# Altium PCB MK2.PcbDoc (part 4 of 7)
Units mil, origin at the board's own origin, x right, y up, seen from the top; angles counter-clockwise.
Board outline 3950 x 3965 mil, 2 copper layers (Top Layer, Bottom Layer); 19 components, 37 nets, 113 pads, 8 vias.
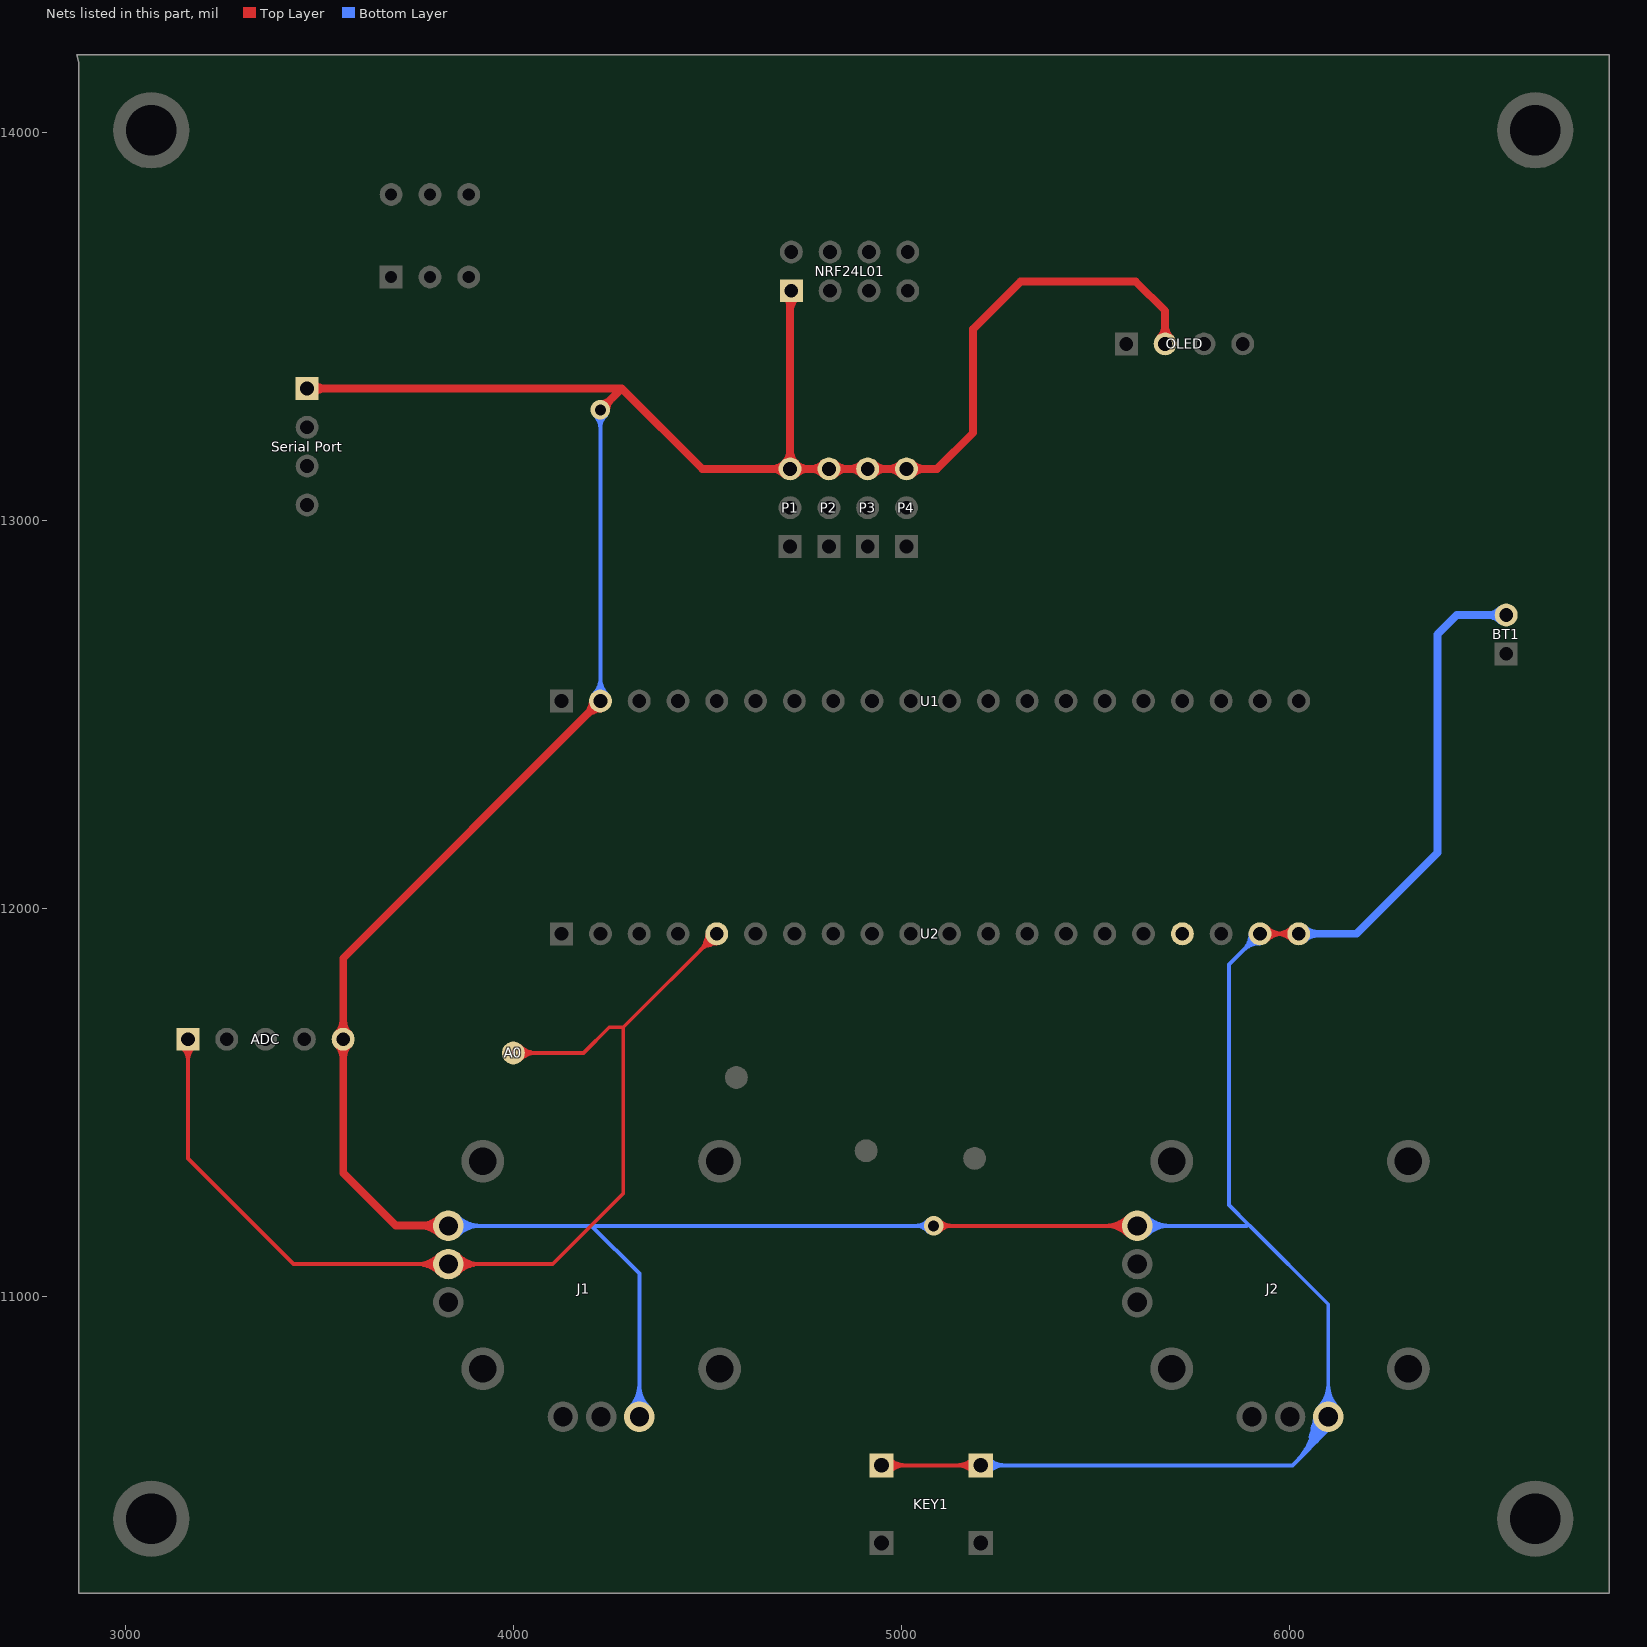
[diagram p4: the nets of this part, all layers, seen from the top]

## Via types
v1: diameter 50, hole 28, Top Layer to Bottom Layer, 8 vias

## Nets (pads, with @x,y where several pads share a name; then routed paths per layer and width w, separated by ;. In a path a pad name is that pad's centre, name@x,y a point inside that pad or via, vN(x,y) a via of type N, cw(c..) or ccw(c..) an arc to the next point about the centre after c; other vN are vias at no path point) (continued)
GND: (continued)
  Bottom Layer w10: J1.6@3832.68,11181.77 4201.54,11181.77 ; U1.2@4224.45,12534.45 v1(4224.45,13284.84) ; J1.1@4324.8,10689.65 4324.8,11058.5 4201.54,11181.77 ; v1(5083.43,11181.77) 4201.54,11181.77 ; KEY1.1@5204.76,10564.37 6007.91,10564.37 6100.39,10656.85 J2.1@6100.39,10689.65 6100.39,10979.76 5898.39,11181.77 5898.23,11181.77 5845,11235 5845,11855 U2.19@5924.45,11934.45 ; J2.6@5608.27,11181.77 5890,11181.77 ; U2.19@5899.92,11934.45 cw(c5840.71,11934.45) 5882.58,11892.58 cw(c5924.45,11850.71) U2.19@5924.45,11909.92 ; U2.19@5909.92,11934.45 cw(c5874.85,11934.45) 5899.65,11909.65 cw(c5924.45,11884.85) U2.19@5924.45,11919.92 ; J1.6@3849.91,11164.54 cw(c3891.51,11122.94) 3891.51,11181.77 ; J1.6@3849.91,11164.54 cw(c3891.51,11122.94) 3891.51,11181.77 ; J1.6@3849.91,11164.54 cw(c3891.51,11122.94) 3891.51,11181.77 ; J1.6@3849.91,11164.54 cw(c3891.51,11122.94) 3891.51,11181.77 ; J1.6@3849.91,11164.54 cw(c3891.51,11122.94) 3891.51,11181.77 ; J1.6@3849.91,11164.54 cw(c3891.51,11122.94) 3891.51,11181.77 ; J1.6@3849.91,11199 ccw(c3891.51,11240.61) 3891.51,11181.77 ; J1.6@3849.91,11199 ccw(c3891.51,11240.61) 3891.51,11181.77 ; J1.6@3849.91,11199 ccw(c3891.51,11240.61) 3891.51,11181.77 ; J1.6@3849.91,11199 ccw(c3891.51,11240.61) 3891.51,11181.77 ; J1.6@3849.91,11199 ccw(c3891.51,11240.61) 3891.51,11181.77 ; J1.6@3849.91,11199 ccw(c3891.51,11240.61) 3891.51,11181.77 ; J1.6@3856.98,11157.47 cw(c3915.65,11098.79) 3915.65,11181.77 ; J1.6@3856.98,11157.47 cw(c3915.65,11098.79) 3915.65,11181.77 ; J1.6@3856.98,11157.47 cw(c3915.65,11098.79) 3915.65,11181.77 ; J1.6@3856.98,11157.47 cw(c3915.65,11098.79) 3915.65,11181.77 ; J1.6@3856.98,11157.47 cw(c3915.65,11098.79) 3915.65,11181.77 ; J1.6@3856.98,11157.47 cw(c3915.65,11098.79) 3915.65,11181.77 ; J1.6@3856.98,11206.08 ccw(c3915.65,11264.75) 3915.65,11181.77 ; J1.6@3856.98,11206.08 ccw(c3915.65,11264.75) 3915.65,11181.77 ; J1.6@3856.98,11206.08 ccw(c3915.65,11264.75) 3915.65,11181.77 ; J1.6@3856.98,11206.08 ccw(c3915.65,11264.75) 3915.65,11181.77 ; J1.6@3856.98,11206.08 ccw(c3915.65,11264.75) 3915.65,11181.77 ; J1.6@3856.98,11206.08 ccw(c3915.65,11264.75) 3915.65,11181.77 ; U1.2@4207.11,12551.79 ccw(c4165.23,12593.66) 4224.45,12593.66 ; U1.2@4207.11,12551.79 ccw(c4165.23,12593.66) 4224.45,12593.66 ; U1.2@4207.11,12551.79 ccw(c4165.23,12593.66) 4224.45,12593.66 ; U1.2@4207.11,12551.79 ccw(c4165.23,12593.66) 4224.45,12593.66 ; U1.2@4207.11,12551.79 ccw(c4165.23,12593.66) 4224.45,12593.66 ; U1.2@4207.11,12551.79 ccw(c4165.23,12593.66) 4224.45,12593.66 ; v1@4210.31,13270.7 cw(c4176.16,13236.56) 4224.45,13236.56 ; v1@4210.31,13270.7 cw(c4176.16,13236.56) 4224.45,13236.56 ; v1@4210.31,13270.7 cw(c4176.16,13236.56) 4224.45,13236.56 ; v1@4210.31,13270.7 cw(c4176.16,13236.56) 4224.45,13236.56 ; v1@4210.31,13270.7 cw(c4176.16,13236.56) 4224.45,13236.56 ; v1@4210.31,13270.7 cw(c4176.16,13236.56) 4224.45,13236.56 ; U1.2@4214.18,12544.72 ccw(c4189.38,12569.52) 4224.45,12569.52 ; U1.2@4214.18,12544.72 ccw(c4189.38,12569.52) 4224.45,12569.52 ; U1.2@4214.18,12544.72 ccw(c4189.38,12569.52) 4224.45,12569.52 ; U1.2@4214.18,12544.72 ccw(c4189.38,12569.52) 4224.45,12569.52 ; U1.2@4214.18,12544.72 ccw(c4189.38,12569.52) 4224.45,12569.52 ; U1.2@4214.18,12544.72 ccw(c4189.38,12569.52) 4224.45,12569.52 ; 4224.45,12569.52 ccw(c4259.52,12569.52) U1.2@4234.72,12544.72 ; 4224.45,12569.52 ccw(c4259.52,12569.52) U1.2@4234.72,12544.72 ; 4224.45,12569.52 ccw(c4259.52,12569.52) U1.2@4234.72,12544.72 ; 4224.45,12569.52 ccw(c4259.52,12569.52) U1.2@4234.72,12544.72 ; 4224.45,12569.52 ccw(c4259.52,12569.52) U1.2@4234.72,12544.72 ; 4224.45,12569.52 ccw(c4259.52,12569.52) U1.2@4234.72,12544.72 ; 4224.45,12593.66 ccw(c4283.66,12593.66) U1.2@4241.79,12551.79 ; 4224.45,12593.66 ccw(c4283.66,12593.66) U1.2@4241.79,12551.79 ; 4224.45,12593.66 ccw(c4283.66,12593.66) U1.2@4241.79,12551.79 ; 4224.45,12593.66 ccw(c4283.66,12593.66) U1.2@4241.79,12551.79 ; 4224.45,12593.66 ccw(c4283.66,12593.66) U1.2@4241.79,12551.79 ; 4224.45,12593.66 ccw(c4283.66,12593.66) U1.2@4241.79,12551.79 ; 4224.45,13236.56 cw(c4272.73,13236.56) v1@4238.59,13270.7 ; 4224.45,13236.56 cw(c4272.73,13236.56) v1@4238.59,13270.7 ; 4224.45,13236.56 cw(c4272.73,13236.56) v1@4238.59,13270.7 ; 4224.45,13236.56 cw(c4272.73,13236.56) v1@4238.59,13270.7 ; 4224.45,13236.56 cw(c4272.73,13236.56) v1@4238.59,13270.7 ; 4224.45,13236.56 cw(c4272.73,13236.56) v1@4238.59,13270.7 ; J1.1@4300.5,10713.95 ccw(c4241.83,10772.62) 4324.8,10772.62 ; J1.1@4300.5,10713.95 ccw(c4241.83,10772.62) 4324.8,10772.62 ; J1.1@4300.5,10713.95 ccw(c4241.83,10772.62) 4324.8,10772.62 ; J1.1@4300.5,10713.95 ccw(c4241.83,10772.62) 4324.8,10772.62 ; J1.1@4300.5,10713.95 ccw(c4241.83,10772.62) 4324.8,10772.62 ; J1.1@4300.5,10713.95 ccw(c4241.83,10772.62) 4324.8,10772.62 ; J1.1@4307.57,10706.88 ccw(c4265.97,10748.48) 4324.8,10748.48 ; J1.1@4307.57,10706.88 ccw(c4265.97,10748.48) 4324.8,10748.48 ; J1.1@4307.57,10706.88 ccw(c4265.97,10748.48) 4324.8,10748.48 ; J1.1@4307.57,10706.88 ccw(c4265.97,10748.48) 4324.8,10748.48 ; J1.1@4307.57,10706.88 ccw(c4265.97,10748.48) 4324.8,10748.48 ; J1.1@4307.57,10706.88 ccw(c4265.97,10748.48) 4324.8,10748.48 ; 4324.8,10748.48 ccw(c4383.64,10748.48) J1.1@4342.04,10706.88 ; 4324.8,10748.48 ccw(c4383.64,10748.48) J1.1@4342.04,10706.88 ; 4324.8,10748.48 ccw(c4383.64,10748.48) J1.1@4342.04,10706.88 ; 4324.8,10748.48 ccw(c4383.64,10748.48) J1.1@4342.04,10706.88 ; 4324.8,10748.48 ccw(c4383.64,10748.48) J1.1@4342.04,10706.88 ; 4324.8,10748.48 ccw(c4383.64,10748.48) J1.1@4342.04,10706.88 ; 4324.8,10772.62 ccw(c4407.78,10772.62) J1.1@4349.11,10713.95 ; 4324.8,10772.62 ccw(c4407.78,10772.62) J1.1@4349.11,10713.95 ; 4324.8,10772.62 ccw(c4407.78,10772.62) J1.1@4349.11,10713.95 ; 4324.8,10772.62 ccw(c4407.78,10772.62) J1.1@4349.11,10713.95 ; 4324.8,10772.62 ccw(c4407.78,10772.62) J1.1@4349.11,10713.95 ; 4324.8,10772.62 ccw(c4407.78,10772.62) J1.1@4349.11,10713.95 ; 5035.14,11181.77 cw(c5035.14,11133.49) v1@5069.28,11167.63 ; 5035.14,11181.77 ccw(c5035.14,11230.06) v1@5069.28,11195.91 ; 5035.14,11181.77 ccw(c5035.14,11230.06) v1@5069.28,11195.91 ; 5035.14,11181.77 cw(c5035.14,11133.49) v1@5069.28,11167.63 ; 5035.14,11181.77 ccw(c5035.14,11230.06) v1@5069.28,11195.91 ; 5035.14,11181.77 cw(c5035.14,11133.49) v1@5069.28,11167.63 ; 5035.14,11181.77 ccw(c5035.14,11230.06) v1@5069.28,11195.91 ; 5035.14,11181.77 cw(c5035.14,11133.49) v1@5069.28,11167.63 ; 5035.14,11181.77 ccw(c5035.14,11230.06) v1@5069.28,11195.91 ; 5035.14,11181.77 cw(c5035.14,11133.49) v1@5069.28,11167.63 ; 5035.14,11181.77 ccw(c5035.14,11230.06) v1@5069.28,11195.91 ; 5035.14,11181.77 cw(c5035.14,11133.49) v1@5069.28,11167.63 ; KEY1.1@5216.08,10553.06 cw(c5243.39,10525.74) 5243.39,10564.37 ; KEY1.1@5216.08,10553.06 cw(c5243.39,10525.74) 5243.39,10564.37 ; KEY1.1@5216.08,10553.06 cw(c5243.39,10525.74) 5243.39,10564.37 ; KEY1.1@5216.08,10553.06 cw(c5243.39,10525.74) 5243.39,10564.37 ; KEY1.1@5216.08,10553.06 cw(c5243.39,10525.74) 5243.39,10564.37 ; KEY1.1@5216.08,10553.06 cw(c5243.39,10525.74) 5243.39,10564.37 ; KEY1.1@5216.08,10575.68 ccw(c5243.39,10603) 5243.39,10564.37 ; KEY1.1@5216.08,10575.68 ccw(c5243.39,10603) 5243.39,10564.37 ; KEY1.1@5216.08,10575.68 ccw(c5243.39,10603) 5243.39,10564.37 ; KEY1.1@5216.08,10575.68 ccw(c5243.39,10603) 5243.39,10564.37 ; KEY1.1@5216.08,10575.68 ccw(c5243.39,10603) 5243.39,10564.37 ; KEY1.1@5216.08,10575.68 ccw(c5243.39,10603) 5243.39,10564.37 ; KEY1.1@5223.15,10545.99 cw(c5267.53,10501.6) 5267.53,10564.37 ; KEY1.1@5223.15,10545.99 cw(c5267.53,10501.6) 5267.53,10564.37 ; KEY1.1@5223.15,10545.99 cw(c5267.53,10501.6) 5267.53,10564.37 ; KEY1.1@5223.15,10545.99 cw(c5267.53,10501.6) 5267.53,10564.37 ; KEY1.1@5223.15,10545.99 cw(c5267.53,10501.6) 5267.53,10564.37 ; KEY1.1@5223.15,10545.99 cw(c5267.53,10501.6) 5267.53,10564.37 ; KEY1.1@5223.15,10582.75 ccw(c5267.53,10627.14) 5267.53,10564.37 ; KEY1.1@5223.15,10582.75 ccw(c5267.53,10627.14) 5267.53,10564.37 ; KEY1.1@5223.15,10582.75 ccw(c5267.53,10627.14) 5267.53,10564.37 ; KEY1.1@5223.15,10582.75 ccw(c5267.53,10627.14) 5267.53,10564.37 ; KEY1.1@5223.15,10582.75 ccw(c5267.53,10627.14) 5267.53,10564.37 ; KEY1.1@5223.15,10582.75 ccw(c5267.53,10627.14) 5267.53,10564.37 ; J2.6@5625.5,11164.54 cw(c5667.1,11122.94) 5667.1,11181.77 ; J2.6@5625.5,11164.54 cw(c5667.1,11122.94) 5667.1,11181.77 ; J2.6@5625.5,11164.54 cw(c5667.1,11122.94) 5667.1,11181.77 ; J2.6@5625.5,11164.54 cw(c5667.1,11122.94) 5667.1,11181.77 ; J2.6@5625.5,11164.54 cw(c5667.1,11122.94) 5667.1,11181.77 ; J2.6@5625.5,11164.54 cw(c5667.1,11122.94) 5667.1,11181.77 ; J2.6@5625.5,11199 ccw(c5667.1,11240.61) 5667.1,11181.77 ; J2.6@5625.5,11199 ccw(c5667.1,11240.61) 5667.1,11181.77 ; J2.6@5625.5,11199 ccw(c5667.1,11240.61) 5667.1,11181.77 ; J2.6@5625.5,11199 ccw(c5667.1,11240.61) 5667.1,11181.77 ; J2.6@5625.5,11199 ccw(c5667.1,11240.61) 5667.1,11181.77 ; J2.6@5625.5,11199 ccw(c5667.1,11240.61) 5667.1,11181.77 ; J2.6@5632.57,11157.47 cw(c5691.24,11098.79) 5691.24,11181.77 ; J2.6@5632.57,11157.47 cw(c5691.24,11098.79) 5691.24,11181.77 ; J2.6@5632.57,11157.47 cw(c5691.24,11098.79) 5691.24,11181.77 ; J2.6@5632.57,11157.47 cw(c5691.24,11098.79) 5691.24,11181.77 ; J2.6@5632.57,11157.47 cw(c5691.24,11098.79) 5691.24,11181.77 ; J2.6@5632.57,11157.47 cw(c5691.24,11098.79) 5691.24,11181.77 ; J2.6@5632.57,11206.08 ccw(c5691.24,11264.75) 5691.24,11181.77 ; J2.6@5632.57,11206.08 ccw(c5691.24,11264.75) 5691.24,11181.77 ; J2.6@5632.57,11206.08 ccw(c5691.24,11264.75) 5691.24,11181.77 ; J2.6@5632.57,11206.08 ccw(c5691.24,11264.75) 5691.24,11181.77 ; J2.6@5632.57,11206.08 ccw(c5691.24,11264.75) 5691.24,11181.77 ; J2.6@5632.57,11206.08 ccw(c5691.24,11264.75) 5691.24,11181.77 ; 5890.51,11900.51 ccw(c5865.99,11925.04) U2.19@5900.23,11930.55 ; 5890.51,11900.51 cw(c5915.04,11875.99) U2.19@5920.55,11910.23 ; 5890.51,11900.51 ccw(c5865.99,11925.04) U2.19@5900.23,11930.55 ; 5890.51,11900.51 cw(c5915.04,11875.99) U2.19@5920.55,11910.23 ; 5890.51,11900.51 ccw(c5865.99,11925.04) U2.19@5900.23,11930.55 ; 5890.51,11900.51 cw(c5915.04,11875.99) U2.19@5920.55,11910.23 ; 5890.51,11900.51 ccw(c5865.99,11925.04) U2.19@5900.23,11930.55 ; 5890.51,11900.51 cw(c5915.04,11875.99) U2.19@5920.55,11910.23 ; 5890.51,11900.51 ccw(c5865.99,11925.04) U2.19@5900.23,11930.55 ; 5890.51,11900.51 cw(c5915.04,11875.99) U2.19@5920.55,11910.23 ; 6018.53,10574.99 ccw(c5903.87,10689.65) J2.1@6066.02,10689.65 ; 6018.53,10574.99 ccw(c5903.87,10689.65) J2.1@6066.02,10689.65 ; 6018.53,10574.99 ccw(c5903.87,10689.65) J2.1@6066.02,10689.65 ; 6018.53,10574.99 ccw(c5903.87,10689.65) J2.1@6066.02,10689.65 ; 6018.53,10574.99 ccw(c5903.87,10689.65) J2.1@6066.02,10689.65 ; 6018.53,10574.99 ccw(c5903.87,10689.65) J2.1@6066.02,10689.65 ; 6035.6,10592.06 ccw(c5938.01,10689.65) J2.1@6076.02,10689.65 ; 6035.6,10592.06 ccw(c5938.01,10689.65) J2.1@6076.02,10689.65 ; 6035.6,10592.06 ccw(c5938.01,10689.65) J2.1@6076.02,10689.65 ; 6035.6,10592.06 ccw(c5938.01,10689.65) J2.1@6076.02,10689.65 ; 6035.6,10592.06 ccw(c5938.01,10689.65) J2.1@6076.02,10689.65 ; 6035.6,10592.06 ccw(c5938.01,10689.65) J2.1@6076.02,10689.65 ; 6052.67,10609.13 ccw(c5972.16,10689.65) J2.1@6086.02,10689.65 ; 6052.67,10609.13 ccw(c5972.16,10689.65) J2.1@6086.02,10689.65 ; 6052.67,10609.13 ccw(c5972.16,10689.65) J2.1@6086.02,10689.65 ; 6052.67,10609.13 ccw(c5972.16,10689.65) J2.1@6086.02,10689.65 ; 6052.67,10609.13 ccw(c5972.16,10689.65) J2.1@6086.02,10689.65 ; 6052.67,10609.13 ccw(c5972.16,10689.65) J2.1@6086.02,10689.65 ; 6054.39,10636.75 cw(c6139.73,10617.98) J2.1@6097.68,10694.58 ; 6054.39,10636.75 cw(c6139.73,10617.98) J2.1@6097.68,10694.58 ; 6054.39,10636.75 cw(c6139.73,10617.98) J2.1@6097.68,10694.58 ; 6054.39,10636.75 cw(c6139.73,10617.98) J2.1@6097.68,10694.58 ; 6054.39,10636.75 cw(c6139.73,10617.98) J2.1@6097.68,10694.58 ; 6054.39,10636.75 cw(c6139.73,10617.98) J2.1@6097.68,10694.58 ; 6054.39,10636.75 cw(c6139.73,10617.98) J2.1@6097.68,10694.58 ; 6054.39,10636.75 cw(c6139.73,10617.98) J2.1@6097.68,10694.58 ; 6054.39,10636.75 cw(c6139.73,10617.98) J2.1@6097.68,10694.58 ; 6054.39,10636.75 cw(c6139.73,10617.98) J2.1@6097.68,10694.58 ; 6054.39,10636.75 cw(c6139.73,10617.98) J2.1@6097.68,10694.58 ; 6054.39,10636.75 cw(c6139.73,10617.98) J2.1@6097.68,10694.58 ; 6054.39,10636.75 cw(c6139.73,10617.98) J2.1@6097.68,10694.58 ; 6054.39,10636.75 cw(c6139.73,10617.98) J2.1@6097.68,10694.58 ; 6054.39,10636.75 cw(c6139.73,10617.98) J2.1@6097.68,10694.58 ; 6058.05,10620.86 cw(c6138.59,10599.81) J2.1@6106.02,10676.42 ; 6058.05,10620.86 cw(c6138.59,10599.81) J2.1@6106.02,10676.42 ; 6058.05,10620.86 cw(c6138.59,10599.81) J2.1@6106.02,10676.42 ; 6058.05,10620.86 cw(c6138.59,10599.81) J2.1@6106.02,10676.42 ; 6058.05,10620.86 cw(c6138.59,10599.81) J2.1@6106.02,10676.42 ; 6058.05,10620.86 cw(c6138.59,10599.81) J2.1@6106.02,10676.42 ; 6058.05,10620.86 cw(c6138.59,10599.81) J2.1@6106.02,10676.42 ; 6058.05,10620.86 cw(c6138.59,10599.81) J2.1@6106.02,10676.42 ; 6058.05,10620.86 cw(c6138.59,10599.81) J2.1@6106.02,10676.42 ; 6058.05,10620.86 cw(c6138.59,10599.81) J2.1@6106.02,10676.42 ; 6058.05,10620.86 cw(c6138.59,10599.81) J2.1@6106.02,10676.42 ; 6058.05,10620.86 cw(c6138.59,10599.81) J2.1@6106.02,10676.42 ; 6058.05,10620.86 cw(c6138.59,10599.81) J2.1@6106.02,10676.42 ; 6058.05,10620.86 cw(c6138.59,10599.81) J2.1@6106.02,10676.42 ; 6058.05,10620.86 cw(c6138.59,10599.81) J2.1@6106.02,10676.42 ; 6059.12,10658.27 cw(c6125.65,10643.63) J2.1@6092.87,10703.35 ; 6059.12,10658.27 cw(c6125.65,10643.63) J2.1@6092.87,10703.35 ; 6059.12,10658.27 cw(c6125.65,10643.63) J2.1@6092.87,10703.35 ; 6059.12,10658.27 cw(c6125.65,10643.63) J2.1@6092.87,10703.35 ; 6059.12,10658.27 cw(c6125.65,10643.63) J2.1@6092.87,10703.35 ; 6059.12,10658.27 cw(c6125.65,10643.63) J2.1@6092.87,10703.35 ; 6059.12,10658.27 cw(c6125.65,10643.63) J2.1@6092.87,10703.35 ; 6059.12,10658.27 cw(c6125.65,10643.63) J2.1@6092.87,10703.35 ; 6059.12,10658.27 cw(c6125.65,10643.63) J2.1@6092.87,10703.35 ; 6059.12,10658.27 cw(c6125.65,10643.63) J2.1@6092.87,10703.35 ; 6059.12,10658.27 cw(c6125.65,10643.63) J2.1@6092.87,10703.35 ; 6059.12,10658.27 cw(c6125.65,10643.63) J2.1@6092.87,10703.35 ; 6059.12,10658.27 cw(c6125.65,10643.63) J2.1@6092.87,10703.35 ; 6059.12,10658.27 cw(c6125.65,10643.63) J2.1@6092.87,10703.35 ; 6059.12,10658.27 cw(c6125.65,10643.63) J2.1@6092.87,10703.35 ; 6063.2,10640.56 cw(c6128.52,10623.48) J2.1@6102.1,10685.62 ; 6063.2,10640.56 cw(c6128.52,10623.48) J2.1@6102.1,10685.62 ; 6063.2,10640.56 cw(c6128.52,10623.48) J2.1@6102.1,10685.62 ; 6063.2,10640.56 cw(c6128.52,10623.48) J2.1@6102.1,10685.62 ; 6063.2,10640.56 cw(c6128.52,10623.48) J2.1@6102.1,10685.62 ; 6063.2,10640.56 cw(c6128.52,10623.48) J2.1@6102.1,10685.62 ; 6063.2,10640.56 cw(c6128.52,10623.48) J2.1@6102.1,10685.62 ; 6063.2,10640.56 cw(c6128.52,10623.48) J2.1@6102.1,10685.62 ; 6063.2,10640.56 cw(c6128.52,10623.48) J2.1@6102.1,10685.62 ; 6063.2,10640.56 cw(c6128.52,10623.48) J2.1@6102.1,10685.62 ; 6063.2,10640.56 cw(c6128.52,10623.48) J2.1@6102.1,10685.62 ; 6063.2,10640.56 cw(c6128.52,10623.48) J2.1@6102.1,10685.62 ; 6063.2,10640.56 cw(c6128.52,10623.48) J2.1@6102.1,10685.62 ; 6063.2,10640.56 cw(c6128.52,10623.48) J2.1@6102.1,10685.62 ; 6063.2,10640.56 cw(c6128.52,10623.48) J2.1@6102.1,10685.62 ; 6068.34,10660.25 cw(c6118.46,10647.16) J2.1@6098.19,10694.83 ; 6068.34,10660.25 cw(c6118.46,10647.16) J2.1@6098.19,10694.83 ; 6068.34,10660.25 cw(c6118.46,10647.16) J2.1@6098.19,10694.83 ; 6068.34,10660.25 cw(c6118.46,10647.16) J2.1@6098.19,10694.83 ; 6068.34,10660.25 cw(c6118.46,10647.16) J2.1@6098.19,10694.83 ; 6068.34,10660.25 cw(c6118.46,10647.16) J2.1@6098.19,10694.83 ; 6068.34,10660.25 cw(c6118.46,10647.16) J2.1@6098.19,10694.83 ; 6068.34,10660.25 cw(c6118.46,10647.16) J2.1@6098.19,10694.83 ; 6068.34,10660.25 cw(c6118.46,10647.16) J2.1@6098.19,10694.83 ; 6068.34,10660.25 cw(c6118.46,10647.16) J2.1@6098.19,10694.83 ; 6068.34,10660.25 cw(c6118.46,10647.16) J2.1@6098.19,10694.83 ; 6068.34,10660.25 cw(c6118.46,10647.16) J2.1@6098.19,10694.83 ; 6068.34,10660.25 cw(c6118.46,10647.16) J2.1@6098.19,10694.83 ; 6068.34,10660.25 cw(c6118.46,10647.16) J2.1@6098.19,10694.83 ; 6068.34,10660.25 cw(c6118.46,10647.16) J2.1@6098.19,10694.83 ; 6069.37,10647.75 ccw(c6059.55,10660.29) J2.1@6072.48,10669.59 ; 6069.37,10647.75 ccw(c6059.55,10660.29) J2.1@6072.48,10669.59 ; 6069.37,10647.75 ccw(c6059.55,10660.29) J2.1@6072.48,10669.59 ; 6069.37,10647.75 ccw(c6059.55,10660.29) J2.1@6072.48,10669.59 ; 6069.37,10647.75 ccw(c6059.55,10660.29) J2.1@6072.48,10669.59 ; 6069.37,10647.75 ccw(c6059.55,10660.29) J2.1@6072.48,10669.59 ; 6069.37,10647.75 ccw(c6059.55,10660.29) J2.1@6072.48,10669.59 ; 6069.37,10647.75 ccw(c6059.55,10660.29) J2.1@6072.48,10669.59 ; 6069.37,10647.75 ccw(c6059.55,10660.29) J2.1@6072.48,10669.59 ; 6069.37,10647.75 ccw(c6059.55,10660.29) J2.1@6072.48,10669.59 ; 6069.37,10647.75 ccw(c6059.55,10660.29) J2.1@6072.48,10669.59 ; 6069.37,10647.75 ccw(c6059.55,10660.29) J2.1@6072.48,10669.59 ; 6069.37,10647.75 ccw(c6059.55,10660.29) J2.1@6072.48,10669.59 ; 6069.37,10647.75 ccw(c6059.55,10660.29) J2.1@6072.48,10669.59 ; 6069.37,10647.75 ccw(c6059.55,10660.29) J2.1@6072.48,10669.59 ; 6069.37,10647.75 ccw(c6059.55,10660.29) J2.1@6072.48,10669.59 ; 6069.37,10647.75 ccw(c6059.55,10660.29) J2.1@6072.48,10669.59 ; 6069.37,10647.75 ccw(c6059.55,10660.29) J2.1@6072.48,10669.59 ; 6069.37,10647.75 ccw(c6059.55,10660.29) J2.1@6072.48,10669.59 ; 6069.37,10647.75 ccw(c6059.55,10660.29) J2.1@6072.48,10669.59 ; 6069.74,10626.2 ccw(c6006.3,10689.65) J2.1@6096.02,10689.65 ; 6069.74,10626.2 ccw(c6006.3,10689.65) J2.1@6096.02,10689.65 ; 6069.74,10626.2 ccw(c6006.3,10689.65) J2.1@6096.02,10689.65 ; 6069.74,10626.2 ccw(c6006.3,10689.65) J2.1@6096.02,10689.65 ; 6069.74,10626.2 ccw(c6006.3,10689.65) J2.1@6096.02,10689.65 ; 6069.74,10626.2 ccw(c6006.3,10689.65) J2.1@6096.02,10689.65 ; 6069.98,10648.23 cw(c6091.91,10620.21) J2.1@6096.23,10655.53 ; 6069.98,10648.23 cw(c6091.91,10620.21) J2.1@6096.23,10655.53 ; 6069.98,10648.23 cw(c6091.91,10620.21) J2.1@6096.23,10655.53 ; 6069.98,10648.23 cw(c6091.91,10620.21) J2.1@6096.23,10655.53 ; 6069.98,10648.23 cw(c6091.91,10620.21) J2.1@6096.23,10655.53 ; 6069.98,10648.23 cw(c6091.91,10620.21) J2.1@6096.23,10655.53 ; 6069.98,10648.23 cw(c6091.91,10620.21) J2.1@6096.23,10655.53 ; 6069.98,10648.23 cw(c6091.91,10620.21) J2.1@6096.23,10655.53 ; 6069.98,10648.23 cw(c6091.91,10620.21) J2.1@6096.23,10655.53 ; 6069.98,10648.23 cw(c6091.91,10620.21) J2.1@6096.23,10655.53 ; 6069.98,10648.23 cw(c6091.91,10620.21) J2.1@6096.23,10655.53 ; 6069.98,10648.23 cw(c6091.91,10620.21) J2.1@6096.23,10655.53 ; 6069.98,10648.23 cw(c6091.91,10620.21) J2.1@6096.23,10655.53 ; 6069.98,10648.23 cw(c6091.91,10620.21) J2.1@6096.23,10655.53 ; 6069.98,10648.23 cw(c6091.91,10620.21) J2.1@6096.23,10655.53 ; 6069.98,10648.23 cw(c6091.91,10620.21) J2.1@6096.23,10655.53 ; 6069.98,10648.23 cw(c6091.91,10620.21) J2.1@6096.23,10655.53 ; 6069.98,10648.23 cw(c6091.91,10620.21) J2.1@6096.23,10655.53 ; 6069.98,10648.23 cw(c6091.91,10620.21) J2.1@6096.23,10655.53 ; 6069.98,10648.23 cw(c6091.91,10620.21) J2.1@6096.23,10655.53 ; J2.1@6070.63,10672.46 cw(c6039.81,10654.67) 6074.18,10645.46 ; J2.1@6070.63,10672.46 cw(c6039.81,10654.67) 6074.18,10645.46 ; J2.1@6070.63,10672.46 cw(c6039.81,10654.67) 6074.18,10645.46 ; J2.1@6070.63,10672.46 cw(c6039.81,10654.67) 6074.18,10645.46 ; J2.1@6070.63,10672.46 cw(c6039.81,10654.67) 6074.18,10645.46 ; J2.1@6070.63,10672.46 cw(c6039.81,10654.67) 6074.18,10645.46 ; J2.1@6070.63,10672.46 cw(c6039.81,10654.67) 6074.18,10645.46 ; J2.1@6070.63,10672.46 cw(c6039.81,10654.67) 6074.18,10645.46 ; J2.1@6070.63,10672.46 cw(c6039.81,10654.67) 6074.18,10645.46 ; J2.1@6070.63,10672.46 cw(c6039.81,10654.67) 6074.18,10645.46 ; J2.1@6070.63,10672.46 cw(c6039.81,10654.67) 6074.18,10645.46 ; J2.1@6070.63,10672.46 cw(c6039.81,10654.67) 6074.18,10645.46 ; J2.1@6070.63,10672.46 cw(c6039.81,10654.67) 6074.18,10645.46 ; J2.1@6070.63,10672.46 cw(c6039.81,10654.67) 6074.18,10645.46 ; J2.1@6070.63,10672.46 cw(c6039.81,10654.67) 6074.18,10645.46 ; 6073.85,10644.21 cw(c6117.66,10632.46) J2.1@6104.55,10675.89 ; 6073.85,10644.21 cw(c6117.66,10632.46) J2.1@6104.55,10675.89 ; 6073.85,10644.21 cw(c6117.66,10632.46) J2.1@6104.55,10675.89 ; 6073.85,10644.21 cw(c6117.66,10632.46) J2.1@6104.55,10675.89 ; 6073.85,10644.21 cw(c6117.66,10632.46) J2.1@6104.55,10675.89 ; 6073.85,10644.21 cw(c6117.66,10632.46) J2.1@6104.55,10675.89 ; 6073.85,10644.21 cw(c6117.66,10632.46) J2.1@6104.55,10675.89 ; 6073.85,10644.21 cw(c6117.66,10632.46) J2.1@6104.55,10675.89 ; 6073.85,10644.21 cw(c6117.66,10632.46) J2.1@6104.55,10675.89 ; 6073.85,10644.21 cw(c6117.66,10632.46) J2.1@6104.55,10675.89 ; 6073.85,10644.21 cw(c6117.66,10632.46) J2.1@6104.55,10675.89 ; 6073.85,10644.21 cw(c6117.66,10632.46) J2.1@6104.55,10675.89 ; 6073.85,10644.21 cw(c6117.66,10632.46) J2.1@6104.55,10675.89 ; 6073.85,10644.21 cw(c6117.66,10632.46) J2.1@6104.55,10675.89 ; 6073.85,10644.21 cw(c6117.66,10632.46) J2.1@6104.55,10675.89 ; J2.1@6076.09,10713.95 ccw(c6017.42,10772.62) 6100.39,10772.62 ; J2.1@6076.09,10713.95 ccw(c6017.42,10772.62) 6100.39,10772.62 ; J2.1@6076.09,10713.95 ccw(c6017.42,10772.62) 6100.39,10772.62 ; J2.1@6076.09,10713.95 ccw(c6017.42,10772.62) 6100.39,10772.62 ; J2.1@6076.09,10713.95 ccw(c6017.42,10772.62) 6100.39,10772.62 ; J2.1@6076.09,10713.95 ccw(c6017.42,10772.62) 6100.39,10772.62 ; 6077.57,10654.17 ccw(c6068.02,10666.38) J2.1@6080.6,10675.42 ; 6077.57,10654.17 ccw(c6068.02,10666.38) J2.1@6080.6,10675.42 ; 6077.57,10654.17 ccw(c6068.02,10666.38) J2.1@6080.6,10675.42 ; 6077.57,10654.17 ccw(c6068.02,10666.38) J2.1@6080.6,10675.42 ; 6077.57,10654.17 ccw(c6068.02,10666.38) J2.1@6080.6,10675.42 ; 6077.57,10654.17 ccw(c6068.02,10666.38) J2.1@6080.6,10675.42 ; 6077.57,10654.17 ccw(c6068.02,10666.38) J2.1@6080.6,10675.42 ; 6077.57,10654.17 ccw(c6068.02,10666.38) J2.1@6080.6,10675.42 ; 6077.57,10654.17 ccw(c6068.02,10666.38) J2.1@6080.6,10675.42 ; 6077.57,10654.17 ccw(c6068.02,10666.38) J2.1@6080.6,10675.42 ; 6077.57,10654.17 ccw(c6068.02,10666.38) J2.1@6080.6,10675.42 ; 6077.57,10654.17 ccw(c6068.02,10666.38) J2.1@6080.6,10675.42 ; 6077.57,10654.17 ccw(c6068.02,10666.38) J2.1@6080.6,10675.42 ; 6077.57,10654.17 ccw(c6068.02,10666.38) J2.1@6080.6,10675.42 ; 6077.57,10654.17 ccw(c6068.02,10666.38) J2.1@6080.6,10675.42 ; 6077.57,10654.17 ccw(c6068.02,10666.38) J2.1@6080.6,10675.42 ; 6077.57,10654.17 ccw(c6068.02,10666.38) J2.1@6080.6,10675.42 ; 6077.57,10654.17 ccw(c6068.02,10666.38) J2.1@6080.6,10675.42 ; 6077.57,10654.17 ccw(c6068.02,10666.38) J2.1@6080.6,10675.42 ; 6077.57,10654.17 ccw(c6068.02,10666.38) J2.1@6080.6,10675.42 ; J2.1@6083.16,10706.88 ccw(c6041.56,10748.48) 6100.39,10748.48 ; J2.1@6083.16,10706.88 ccw(c6041.56,10748.48) 6100.39,10748.48 ; J2.1@6083.16,10706.88 ccw(c6041.56,10748.48) 6100.39,10748.48 ; J2.1@6083.16,10706.88 ccw(c6041.56,10748.48) 6100.39,10748.48 ; J2.1@6083.16,10706.88 ccw(c6041.56,10748.48) 6100.39,10748.48 ; J2.1@6083.16,10706.88 ccw(c6041.56,10748.48) 6100.39,10748.48 ; 6085.79,10651.46 cw(c6103.99,10646.58) J2.1@6102.42,10665.36 ; 6085.79,10651.46 cw(c6103.99,10646.58) J2.1@6102.42,10665.36 ; 6085.79,10651.46 cw(c6103.99,10646.58) J2.1@6102.42,10665.36 ; 6085.79,10651.46 cw(c6103.99,10646.58) J2.1@6102.42,10665.36 ; 6085.79,10651.46 cw(c6103.99,10646.58) J2.1@6102.42,10665.36 ; 6085.79,10651.46 cw(c6103.99,10646.58) J2.1@6102.42,10665.36 ; 6085.79,10651.46 cw(c6103.99,10646.58) J2.1@6102.42,10665.36 ; 6085.79,10651.46 cw(c6103.99,10646.58) J2.1@6102.42,10665.36 ; 6085.79,10651.46 cw(c6103.99,10646.58) J2.1@6102.42,10665.36 ; 6085.79,10651.46 cw(c6103.99,10646.58) J2.1@6102.42,10665.36 ; 6085.79,10651.46 cw(c6103.99,10646.58) J2.1@6102.42,10665.36 ; 6085.79,10651.46 cw(c6103.99,10646.58) J2.1@6102.42,10665.36 ; 6085.79,10651.46 cw(c6103.99,10646.58) J2.1@6102.42,10665.36 ; 6085.79,10651.46 cw(c6103.99,10646.58) J2.1@6102.42,10665.36 ; 6085.79,10651.46 cw(c6103.99,10646.58) J2.1@6102.42,10665.36 ; 6086.81,10643.27 ccw(c6040.44,10689.65) J2.1@6106.02,10689.65 ; 6086.81,10643.27 ccw(c6040.44,10689.65) J2.1@6106.02,10689.65 ; 6086.81,10643.27 ccw(c6040.44,10689.65) J2.1@6106.02,10689.65 ; 6086.81,10643.27 ccw(c6040.44,10689.65) J2.1@6106.02,10689.65 ; 6086.81,10643.27 ccw(c6040.44,10689.65) J2.1@6106.02,10689.65 ; 6086.81,10643.27 ccw(c6040.44,10689.65) J2.1@6106.02,10689.65 ; 6100.39,10748.48 ccw(c6159.23,10748.48) J2.1@6117.63,10706.88 ; 6100.39,10748.48 ccw(c6159.23,10748.48) J2.1@6117.63,10706.88 ; 6100.39,10748.48 ccw(c6159.23,10748.48) J2.1@6117.63,10706.88 ; 6100.39,10748.48 ccw(c6159.23,10748.48) J2.1@6117.63,10706.88 ; 6100.39,10748.48 ccw(c6159.23,10748.48) J2.1@6117.63,10706.88 ; 6100.39,10748.48 ccw(c6159.23,10748.48) J2.1@6117.63,10706.88 ; 6100.39,10772.62 ccw(c6183.37,10772.62) J2.1@6124.7,10713.95 ; 6100.39,10772.62 ccw(c6183.37,10772.62) J2.1@6124.7,10713.95 ; 6100.39,10772.62 ccw(c6183.37,10772.62) J2.1@6124.7,10713.95 ; 6100.39,10772.62 ccw(c6183.37,10772.62) J2.1@6124.7,10713.95 ; 6100.39,10772.62 ccw(c6183.37,10772.62) J2.1@6124.7,10713.95 ; 6100.39,10772.62 ccw(c6183.37,10772.62) J2.1@6124.7,10713.95 ; 6499.88,12756.1 ccw(c6499.88,12815.32) 6541.75,12773.45 cw(c6499.88,12815.32) 6499.88,12756.1 ; 6499.88,12756.1 cw(c6499.88,12696.89) 6541.75,12738.76 ccw(c6499.88,12696.89) 6499.88,12756.1 ; 6524.02,12756.1 ccw(c6524.02,12791.18) 6548.82,12766.38 cw(c6524.02,12791.18) 6524.02,12756.1 ; 6524.02,12756.1 cw(c6524.02,12721.03) 6548.82,12745.83 ccw(c6524.02,12721.03) 6524.02,12756.1 ; U2.20@6041.79,11917.11 cw(c6083.66,11875.23) 6083.66,11934.45 ccw(c6083.66,11875.23) U2.20@6041.79,11917.11
  Bottom Layer w20: U2.20@6024.45,11934.45 6173.27,11934.45 6381.93,12143.11 6381.93,12706.1 6431.93,12756.1 BT1.2@6559.09,12756.1 ; U2.20@6038.26,11948.26 ccw(c6071.59,11981.59) 6071.59,11934.45 ; U2.20@6038.26,11920.64 cw(c6071.59,11887.31) 6071.59,11934.45 ; U2.20@6038.26,11920.64 cw(c6071.59,11887.31) 6071.59,11934.45 ; U2.20@6038.26,11920.64 cw(c6071.59,11887.31) 6071.59,11934.45 ; U2.20@6038.26,11920.64 cw(c6071.59,11887.31) 6071.59,11934.45 ; 6511.95,12756.1 cw(c6511.95,12708.96) BT1.2@6545.29,12742.29 ; 6511.95,12756.1 ccw(c6511.95,12803.25) BT1.2@6545.29,12769.91 ; 6511.95,12756.1 ccw(c6511.95,12803.25) BT1.2@6545.29,12769.91 ; 6511.95,12756.1 cw(c6511.95,12708.96) BT1.2@6545.29,12742.29 ; 6511.95,12756.1 ccw(c6511.95,12803.25) BT1.2@6545.29,12769.91 ; 6511.95,12756.1 cw(c6511.95,12708.96) BT1.2@6545.29,12742.29 ; 6511.95,12756.1 ccw(c6511.95,12803.25) BT1.2@6545.29,12769.91 ; 6511.95,12756.1 cw(c6511.95,12708.96) BT1.2@6545.29,12742.29
NRST: U2.17
PA0: A0.1 ADC.1 J1.5 U2.5 | length 9312.8
  Top Layer w10: ADC.1@3161.46,11662.8 3161.46,11355.71 3433.82,11083.35 J1.5@3832.68,11083.35 4101.69,11083.35 4283.5,11265.16 4283.5,11693.5 ; A0.1@4000.04,11627.36 4181.14,11627.36 4247.28,11693.5 4283.5,11693.5 ; U2.5@4524.45,11934.45 4283.5,11693.5 ; ADC.1@3144.11,11645.45 cw(c3102.24,11603.58) 3161.46,11603.58 ; ADC.1@3144.11,11645.45 cw(c3102.24,11603.58) 3161.46,11603.58 ; ADC.1@3144.11,11645.45 cw(c3102.24,11603.58) 3161.46,11603.58 ; ADC.1@3144.11,11645.45 cw(c3102.24,11603.58) 3161.46,11603.58 ; ADC.1@3144.11,11645.45 cw(c3102.24,11603.58) 3161.46,11603.58 ; ADC.1@3144.11,11645.45 cw(c3102.24,11603.58) 3161.46,11603.58 ; ADC.1@3151.18,11652.52 cw(c3126.38,11627.72) 3161.46,11627.72 ; ADC.1@3151.18,11652.52 cw(c3126.38,11627.72) 3161.46,11627.72 ; ADC.1@3151.18,11652.52 cw(c3126.38,11627.72) 3161.46,11627.72 ; ADC.1@3151.18,11652.52 cw(c3126.38,11627.72) 3161.46,11627.72 ; ADC.1@3151.18,11652.52 cw(c3126.38,11627.72) 3161.46,11627.72 ; ADC.1@3151.18,11652.52 cw(c3126.38,11627.72) 3161.46,11627.72 ; 3161.46,11603.58 cw(c3220.67,11603.58) ADC.1@3178.8,11645.45 ; 3161.46,11603.58 cw(c3220.67,11603.58) ADC.1@3178.8,11645.45 ; 3161.46,11603.58 cw(c3220.67,11603.58) ADC.1@3178.8,11645.45 ; 3161.46,11603.58 cw(c3220.67,11603.58) ADC.1@3178.8,11645.45 ; 3161.46,11603.58 cw(c3220.67,11603.58) ADC.1@3178.8,11645.45 ; 3161.46,11603.58 cw(c3220.67,11603.58) ADC.1@3178.8,11645.45 ; 3161.46,11627.72 cw(c3196.53,11627.72) ADC.1@3171.73,11652.52 ; 3161.46,11627.72 cw(c3196.53,11627.72) ADC.1@3171.73,11652.52 ; 3161.46,11627.72 cw(c3196.53,11627.72) ADC.1@3171.73,11652.52 ; 3161.46,11627.72 cw(c3196.53,11627.72) ADC.1@3171.73,11652.52 ; 3161.46,11627.72 cw(c3196.53,11627.72) ADC.1@3171.73,11652.52 ; 3161.46,11627.72 cw(c3196.53,11627.72) ADC.1@3171.73,11652.52 ; 3749.7,11083.35 cw(c3749.7,11000.37) J1.5@3808.37,11059.04 ; 3749.7,11083.35 ccw(c3749.7,11166.32) J1.5@3808.37,11107.65 ; 3749.7,11083.35 ccw(c3749.7,11166.32) J1.5@3808.37,11107.65 ; 3749.7,11083.35 cw(c3749.7,11000.37) J1.5@3808.37,11059.04 ; 3749.7,11083.35 ccw(c3749.7,11166.32) J1.5@3808.37,11107.65 ; 3749.7,11083.35 cw(c3749.7,11000.37) J1.5@3808.37,11059.04 ; 3749.7,11083.35 ccw(c3749.7,11166.32) J1.5@3808.37,11107.65 ; 3749.7,11083.35 cw(c3749.7,11000.37) J1.5@3808.37,11059.04 ; 3749.7,11083.35 ccw(c3749.7,11166.32) J1.5@3808.37,11107.65 ; 3749.7,11083.35 cw(c3749.7,11000.37) J1.5@3808.37,11059.04 ; 3749.7,11083.35 ccw(c3749.7,11166.32) J1.5@3808.37,11107.65 ; 3749.7,11083.35 cw(c3749.7,11000.37) J1.5@3808.37,11059.04 ; 3773.84,11083.35 cw(c3773.84,11024.51) J1.5@3815.44,11066.11 ; 3773.84,11083.35 ccw(c3773.84,11142.18) J1.5@3815.44,11100.58 ; 3773.84,11083.35 ccw(c3773.84,11142.18) J1.5@3815.44,11100.58 ; 3773.84,11083.35 cw(c3773.84,11024.51) J1.5@3815.44,11066.11 ; 3773.84,11083.35 ccw(c3773.84,11142.18) J1.5@3815.44,11100.58 ; 3773.84,11083.35 cw(c3773.84,11024.51) J1.5@3815.44,11066.11 ; 3773.84,11083.35 ccw(c3773.84,11142.18) J1.5@3815.44,11100.58 ; 3773.84,11083.35 cw(c3773.84,11024.51) J1.5@3815.44,11066.11 ; 3773.84,11083.35 ccw(c3773.84,11142.18) J1.5@3815.44,11100.58 ; 3773.84,11083.35 cw(c3773.84,11024.51) J1.5@3815.44,11066.11 ; 3773.84,11083.35 ccw(c3773.84,11142.18) J1.5@3815.44,11100.58 ; 3773.84,11083.35 cw(c3773.84,11024.51) J1.5@3815.44,11066.11 ; J1.5@3849.91,11066.11 cw(c3891.51,11024.51) 3891.51,11083.35 ; J1.5@3849.91,11066.11 cw(c3891.51,11024.51) 3891.51,11083.35 ; J1.5@3849.91,11066.11 cw(c3891.51,11024.51) 3891.51,11083.35 ; J1.5@3849.91,11066.11 cw(c3891.51,11024.51) 3891.51,11083.35 ; J1.5@3849.91,11066.11 cw(c3891.51,11024.51) 3891.51,11083.35 ; J1.5@3849.91,11066.11 cw(c3891.51,11024.51) 3891.51,11083.35 ; J1.5@3849.91,11100.58 ccw(c3891.51,11142.18) 3891.51,11083.35 ; J1.5@3849.91,11100.58 ccw(c3891.51,11142.18) 3891.51,11083.35 ; J1.5@3849.91,11100.58 ccw(c3891.51,11142.18) 3891.51,11083.35 ; J1.5@3849.91,11100.58 ccw(c3891.51,11142.18) 3891.51,11083.35 ; J1.5@3849.91,11100.58 ccw(c3891.51,11142.18) 3891.51,11083.35 ; J1.5@3849.91,11100.58 ccw(c3891.51,11142.18) 3891.51,11083.35 ; J1.5@3856.98,11059.04 cw(c3915.65,11000.37) 3915.65,11083.35 ; J1.5@3856.98,11059.04 cw(c3915.65,11000.37) 3915.65,11083.35 ; J1.5@3856.98,11059.04 cw(c3915.65,11000.37) 3915.65,11083.35 ; J1.5@3856.98,11059.04 cw(c3915.65,11000.37) 3915.65,11083.35 ; J1.5@3856.98,11059.04 cw(c3915.65,11000.37) 3915.65,11083.35 ; J1.5@3856.98,11059.04 cw(c3915.65,11000.37) 3915.65,11083.35 ; J1.5@3856.98,11107.65 ccw(c3915.65,11166.32) 3915.65,11083.35 ; J1.5@3856.98,11107.65 ccw(c3915.65,11166.32) 3915.65,11083.35 ; J1.5@3856.98,11107.65 ccw(c3915.65,11166.32) 3915.65,11083.35 ; J1.5@3856.98,11107.65 ccw(c3915.65,11166.32) 3915.65,11083.35 ; J1.5@3856.98,11107.65 ccw(c3915.65,11166.32) 3915.65,11083.35 ; J1.5@3856.98,11107.65 ccw(c3915.65,11166.32) 3915.65,11083.35 ; A0.1@4010.31,11617.09 cw(c4035.11,11592.29) 4035.11,11627.36 ; A0.1@4010.31,11617.09 cw(c4035.11,11592.29) 4035.11,11627.36 ; A0.1@4010.31,11617.09 cw(c4035.11,11592.29) 4035.11,11627.36 ; A0.1@4010.31,11617.09 cw(c4035.11,11592.29) 4035.11,11627.36 ; A0.1@4010.31,11617.09 cw(c4035.11,11592.29) 4035.11,11627.36 ; A0.1@4010.31,11617.09 cw(c4035.11,11592.29) 4035.11,11627.36 ; A0.1@4010.31,11637.63 ccw(c4035.11,11662.43) 4035.11,11627.36 ; A0.1@4010.31,11637.63 ccw(c4035.11,11662.43) 4035.11,11627.36 ; A0.1@4010.31,11637.63 ccw(c4035.11,11662.43) 4035.11,11627.36 ; A0.1@4010.31,11637.63 ccw(c4035.11,11662.43) 4035.11,11627.36 ; A0.1@4010.31,11637.63 ccw(c4035.11,11662.43) 4035.11,11627.36 ; A0.1@4010.31,11637.63 ccw(c4035.11,11662.43) 4035.11,11627.36 ; A0.1@4017.38,11610.02 cw(c4059.25,11568.15) 4059.25,11627.36 ; A0.1@4017.38,11610.02 cw(c4059.25,11568.15) 4059.25,11627.36 ; A0.1@4017.38,11610.02 cw(c4059.25,11568.15) 4059.25,11627.36 ; A0.1@4017.38,11610.02 cw(c4059.25,11568.15) 4059.25,11627.36 ; A0.1@4017.38,11610.02 cw(c4059.25,11568.15) 4059.25,11627.36 ; A0.1@4017.38,11610.02 cw(c4059.25,11568.15) 4059.25,11627.36 ; A0.1@4017.38,11644.71 ccw(c4059.25,11686.58) 4059.25,11627.36 ; A0.1@4017.38,11644.71 ccw(c4059.25,11686.58) 4059.25,11627.36 ; A0.1@4017.38,11644.71 ccw(c4059.25,11686.58) 4059.25,11627.36 ; A0.1@4017.38,11644.71 ccw(c4059.25,11686.58) 4059.25,11627.36 ; A0.1@4017.38,11644.71 ccw(c4059.25,11686.58) 4059.25,11627.36 ; A0.1@4017.38,11644.71 ccw(c4059.25,11686.58) 4059.25,11627.36 ; 4482.58,11892.58 cw(c4524.45,11850.71) U2.5@4524.45,11909.92 ; 4482.58,11892.58 ccw(c4440.71,11934.45) U2.5@4499.92,11934.45 ; 4482.58,11892.58 ccw(c4440.71,11934.45) U2.5@4499.92,11934.45 ; 4482.58,11892.58 cw(c4524.45,11850.71) U2.5@4524.45,11909.92 ; 4482.58,11892.58 ccw(c4440.71,11934.45) U2.5@4499.92,11934.45 ; 4482.58,11892.58 cw(c4524.45,11850.71) U2.5@4524.45,11909.92 ; 4482.58,11892.58 ccw(c4440.71,11934.45) U2.5@4499.92,11934.45 ; 4482.58,11892.58 cw(c4524.45,11850.71) U2.5@4524.45,11909.92 ; 4482.58,11892.58 ccw(c4440.71,11934.45) U2.5@4499.92,11934.45 ; 4482.58,11892.58 cw(c4524.45,11850.71) U2.5@4524.45,11909.92 ; 4482.58,11892.58 ccw(c4440.71,11934.45) U2.5@4499.92,11934.45 ; 4482.58,11892.58 cw(c4524.45,11850.71) U2.5@4524.45,11909.92 ; 4493.93,11912.1 cw(c4531.06,11902.15) U2.5@4523.35,11939.81 ; 4493.93,11912.1 cw(c4531.06,11902.15) U2.5@4523.35,11939.81 ; 4493.93,11912.1 cw(c4531.06,11902.15) U2.5@4523.35,11939.81 ; 4493.93,11912.1 cw(c4531.06,11902.15) U2.5@4523.35,11939.81 ; 4493.93,11912.1 cw(c4531.06,11902.15) U2.5@4523.35,11939.81 ; 4493.93,11912.1 cw(c4531.06,11902.15) U2.5@4523.35,11939.81 ; 4493.93,11912.1 cw(c4531.06,11902.15) U2.5@4523.35,11939.81 ; 4493.93,11912.1 cw(c4531.06,11902.15) U2.5@4523.35,11939.81 ; 4493.93,11912.1 cw(c4531.06,11902.15) U2.5@4523.35,11939.81 ; 4493.93,11912.1 cw(c4531.06,11902.15) U2.5@4523.35,11939.81 ; 4493.93,11912.1 cw(c4531.06,11902.15) U2.5@4523.35,11939.81 ; 4493.93,11912.1 cw(c4531.06,11902.15) U2.5@4523.35,11939.81 ; 4493.93,11912.1 cw(c4531.06,11902.15) U2.5@4523.35,11939.81 ; 4493.93,11912.1 cw(c4531.06,11902.15) U2.5@4523.35,11939.81 ; 4493.93,11912.1 cw(c4531.06,11902.15) U2.5@4523.35,11939.81 ; 4499.65,11909.65 cw(c4524.45,11884.85) U2.5@4524.45,11919.92 ; 4499.65,11909.65 ccw(c4474.85,11934.45) U2.5@4509.92,11934.45 ; 4499.65,11909.65 ccw(c4474.85,11934.45) U2.5@4509.92,11934.45 ; 4499.65,11909.65 cw(c4524.45,11884.85) U2.5@4524.45,11919.92 ; 4499.65,11909.65 ccw(c4474.85,11934.45) U2.5@4509.92,11934.45 ; 4499.65,11909.65 cw(c4524.45,11884.85) U2.5@4524.45,11919.92 ; 4499.65,11909.65 ccw(c4474.85,11934.45) U2.5@4509.92,11934.45 ; 4499.65,11909.65 cw(c4524.45,11884.85) U2.5@4524.45,11919.92 ; 4499.65,11909.65 ccw(c4474.85,11934.45) U2.5@4509.92,11934.45 ; 4499.65,11909.65 cw(c4524.45,11884.85) U2.5@4524.45,11919.92 ; 4499.65,11909.65 ccw(c4474.85,11934.45) U2.5@4509.92,11934.45 ; 4499.65,11909.65 cw(c4524.45,11884.85) U2.5@4524.45,11919.92 ; 4502.1,11903.93 ccw(c4492.15,11941.06) U2.5@4529.81,11933.35 ; 4502.1,11903.93 ccw(c4492.15,11941.06) U2.5@4529.81,11933.35 ; 4502.1,11903.93 ccw(c4492.15,11941.06) U2.5@4529.81,11933.35 ; 4502.1,11903.93 ccw(c4492.15,11941.06) U2.5@4529.81,11933.35 ; 4502.1,11903.93 ccw(c4492.15,11941.06) U2.5@4529.81,11933.35 ; 4502.1,11903.93 ccw(c4492.15,11941.06) U2.5@4529.81,11933.35 ; 4502.1,11903.93 ccw(c4492.15,11941.06) U2.5@4529.81,11933.35 ; 4502.1,11903.93 ccw(c4492.15,11941.06) U2.5@4529.81,11933.35 ; 4502.1,11903.93 ccw(c4492.15,11941.06) U2.5@4529.81,11933.35 ; 4502.1,11903.93 ccw(c4492.15,11941.06) U2.5@4529.81,11933.35 ; 4502.1,11903.93 ccw(c4492.15,11941.06) U2.5@4529.81,11933.35 ; 4502.1,11903.93 ccw(c4492.15,11941.06) U2.5@4529.81,11933.35 ; 4502.1,11903.93 ccw(c4492.15,11941.06) U2.5@4529.81,11933.35 ; 4502.1,11903.93 ccw(c4492.15,11941.06) U2.5@4529.81,11933.35 ; 4502.1,11903.93 ccw(c4492.15,11941.06) U2.5@4529.81,11933.35